# Allegro board pultonpcbtest.brd
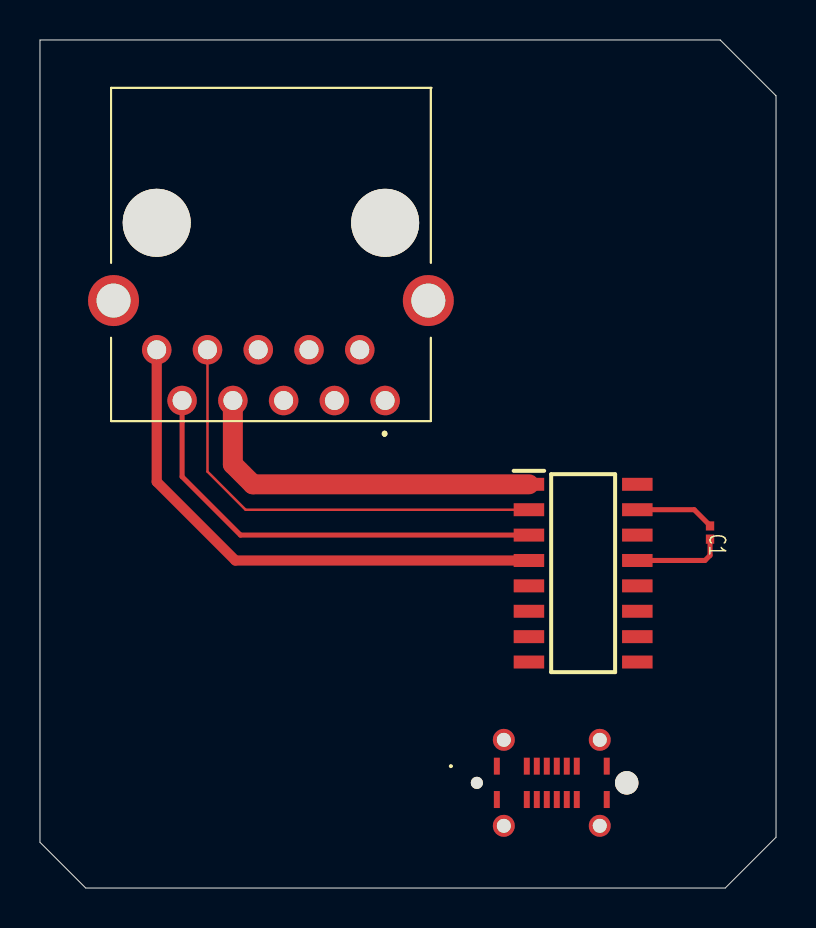
[diagram p0: board, top side]
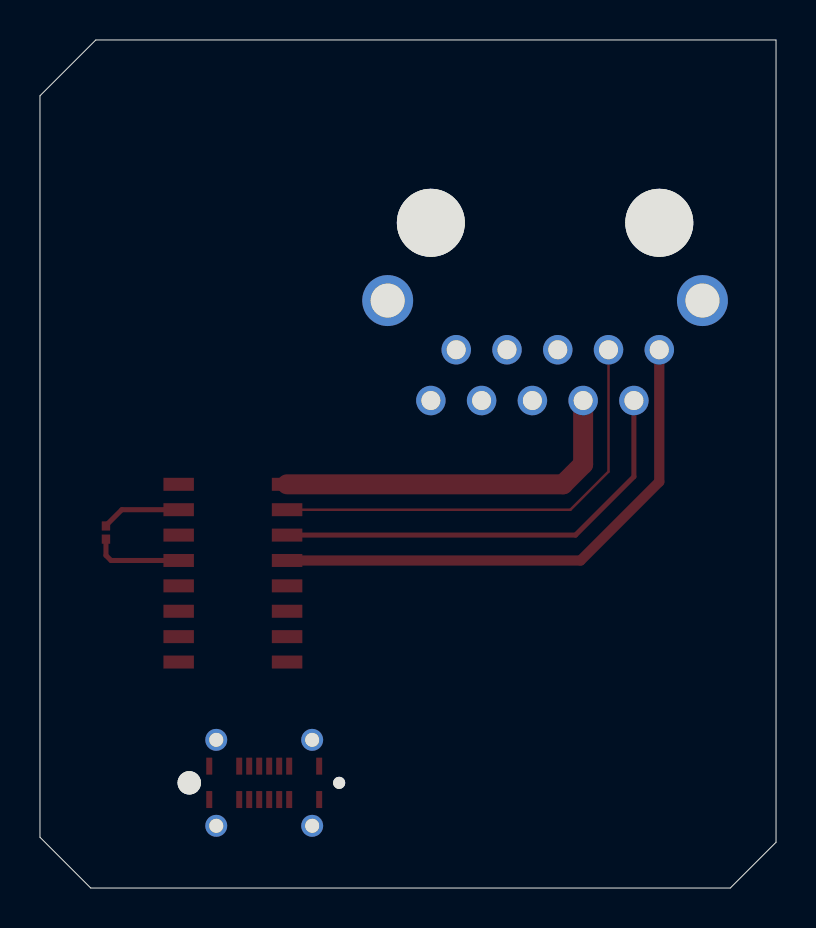
[diagram p1: board, bottom side, seen from below]

Outline 36.83 x 42.42 mm; copper layers: TOP, BOTTOM. Coordinates in mm from the lower left corner of the outline.
Outline path: 0,42.42 34.04,42.42 36.83,39.62 36.83,2.54 34.29,0 2.29,0 0,2.29 0,42.42

## Design rules (mm)
constraint set DEFAULT: min track width 0.127

## Placement (name value [footprint] x y rotation side)
C1  GRM033D70E105ME15D  [CAPC0603X33N]  33.53 17.78 270 top
IC1  ST232ACDR  [SOIC127P600X175-16N]  27.18 15.75 0 top
J1  219320-0001  [2193200001]  22.86 6.1 0 top
J2  -  [RJE741AA1410A]  17.27 24.38 180 top

## Library data of the parts
C1 = GRM033D70E105ME15D
IC1 = ST232ACDR
J1 = 219320-0001
J2 = RJE741AA1410A

## Footprints (pads in the part's own frame, mm; a bottom-side part is the same pattern mirrored in y, then rotated)
2193200001
  round 0.6 hole 0.6 unplated: (-1,-0.835)
  round 1.17 hole 1.17 unplated: (6.5,-0.835)
  rect 0.3x0.85 smd: A1(0,0) A4(1.5,0) A5(2,0) A6(2.5,0) A7(3,0) A8(3.5,0) A9(4,0) A12(5.5,0) B1(5.5,-1.67) B4(4,-1.67) B5(3.5,-1.67) B6(3,-1.67) B7(2.5,-1.67) B8(2,-1.67) B9(1.5,-1.67) B12(0,-1.67)
  round 1.1 hole 0.7: MH3(0.35,1.315) MH4(5.15,1.315) MH5(5.15,-2.985) MH6(0.35,-2.985)
CAPC0603X33N
  rect 0.46x0.42 smd: 1(-0.33,0) 2(0.33,0)
RJE741AA1410A
  round 3.4 hole 3.4 unplated: (0,-8.89) (11.43,-8.89)
  round 1.478 hole 0.95: 1(0,0) 2(1.27,-2.54) 3(2.54,0) 4(3.81,-2.54) 5(5.08,0) 6(6.35,-2.54) 7(7.62,0) 8(8.89,-2.54) 9(10.16,0) 10(11.43,-2.54)
  round 2.55 hole 1.7: MH1(-2.16,-5) MH2(13.59,-5)
SOIC127P600X175-16N
  rect 1.525x0.65 smd: 1(-2.712,4.445) 2(-2.712,3.175) 3(-2.712,1.905) 4(-2.712,0.635) 5(-2.712,-0.635) 6(-2.712,-1.905) 7(-2.712,-3.175) 8(-2.712,-4.445) 9(2.712,-4.445) 10(2.712,-3.175) 11(2.712,-1.905) 12(2.712,-0.635) 13(2.712,0.635) 14(2.712,1.905) 15(2.712,3.175) 16(2.712,4.445)

## Nets
GND: C1.1 IC1.15
N00492: C1.2 IC1.13
N00532: IC1.16(VCC)
N00727: IC1.1 J2.7
N00731: IC1.2 J2.8
N00735: IC1.3 J2.9
N00739: IC1.4 J2.10

Pads without a net: IC1 5 6 7 8 9 10 11 12 14; J1 A1 A4 A5 A6 A7 A8 A9 A12 B1 B4 B5 B6 B7 B8 B9 B12 MH3 MH4 MH5 MH6; J2 1 2 3 4 5 6 MH1 MH2

## Routing (per net, layer and track width the routed paths; a pad name or vN(x,y) marks a point on that pad's centre or on a via; arc(x,y) is an arc through that point)
GND: length 4
  TOP w0.254: C1.1 33.53,18.13 32.73,18.92 IC1.15
N00492: length 4.6
  TOP w0.254: C1.2 33.53,16.64 33.27,16.38 29.89,16.38
N00727: length 18.4
  TOP w1: IC1.1 10.65,20.19 9.65,21.19 J2.7
N00731: length 23
  TOP w0.127: IC1.2 10.29,18.92 8.38,20.83 J2.8
N00735: length 22.4
  TOP w0.254: J2.9 7.11,20.57 10.03,17.65 IC1.3
N00739: length 26.9
  TOP w0.512: J2.10 5.84,20.32 9.78,16.38 24.47,16.38

## Text on the board
NCLEGEND-1-2: FIGURE | FINISHED_SIZE | 0.7 | 0.95 | 1.7 | 0.5999 | 1.1699 | 3.4 | DRILL CHART: TOP to BOTTOM | ALL UNITS ARE IN MILLIMETERS | DRILLED_SIZE | - | PLATED | NON-PLATED | QTY | 4 | 10 | 2 | 1 | 20 | TOTAL HOLES:
